# Altium PCB PCB.PcbDoc
Units mm, origin at the board's own origin, x right, y up, seen from the top; angles counter-clockwise.
Board outline 74 x 41.8 mm, 4 copper layers (SIG 1, GND, PWR, SIG 2), stack 0.603 mm thick; 54 components, 39 nets, 183 pads, 272 vias.
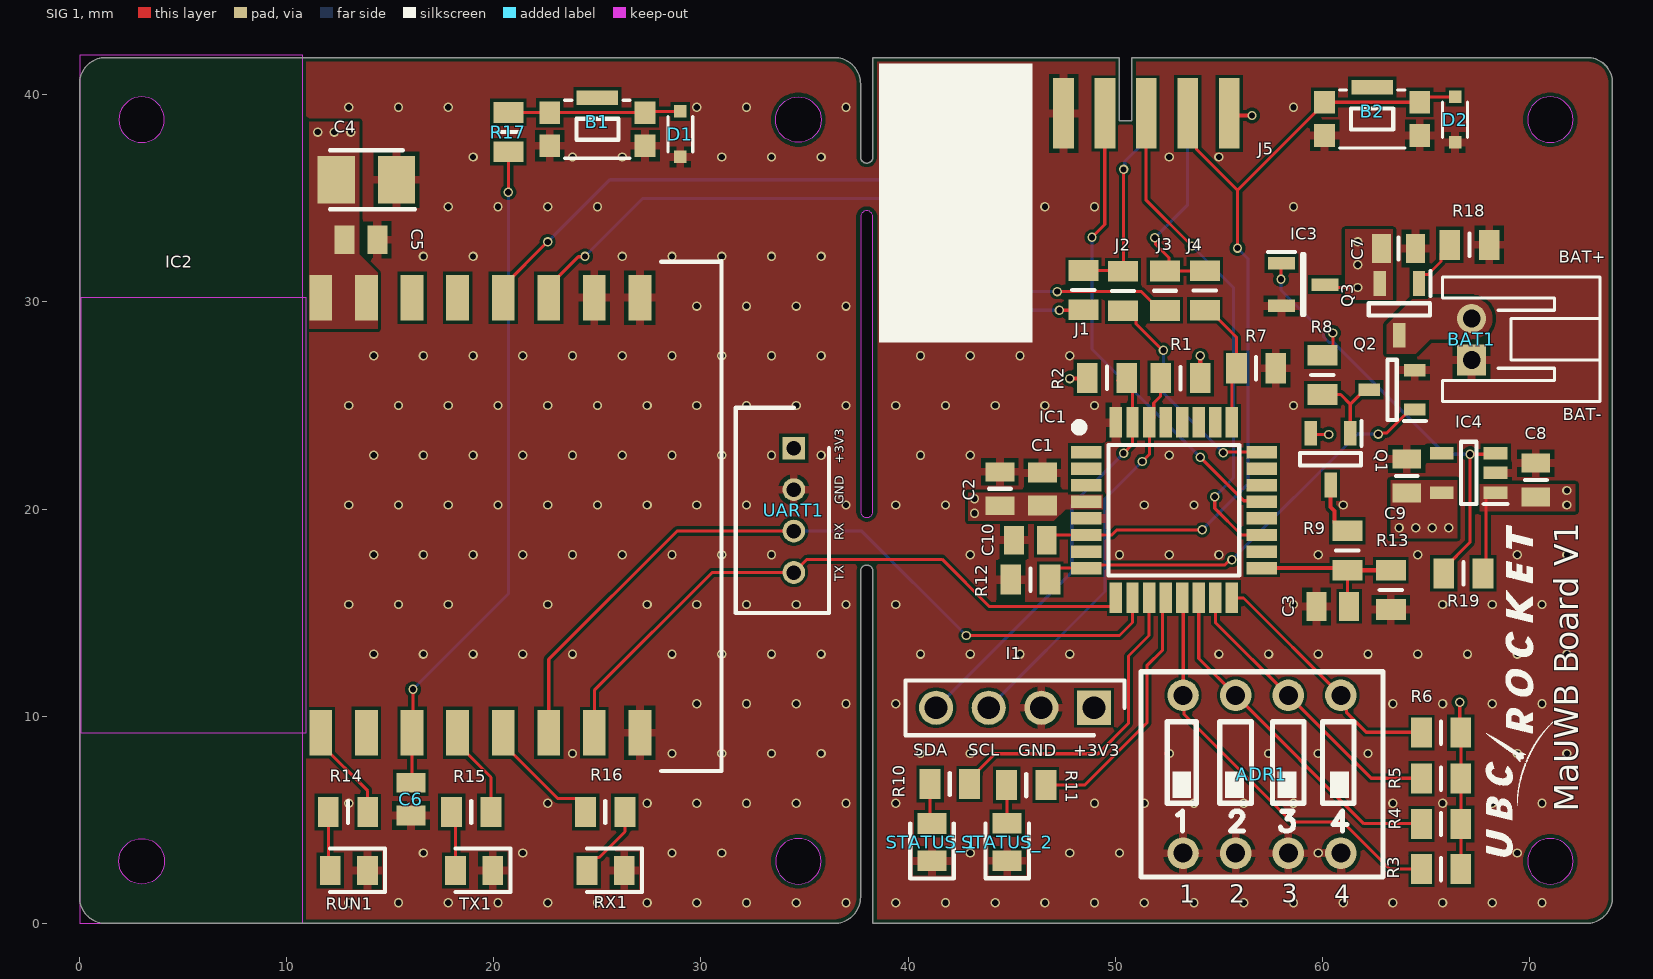
[diagram p0: SIG 1 view]
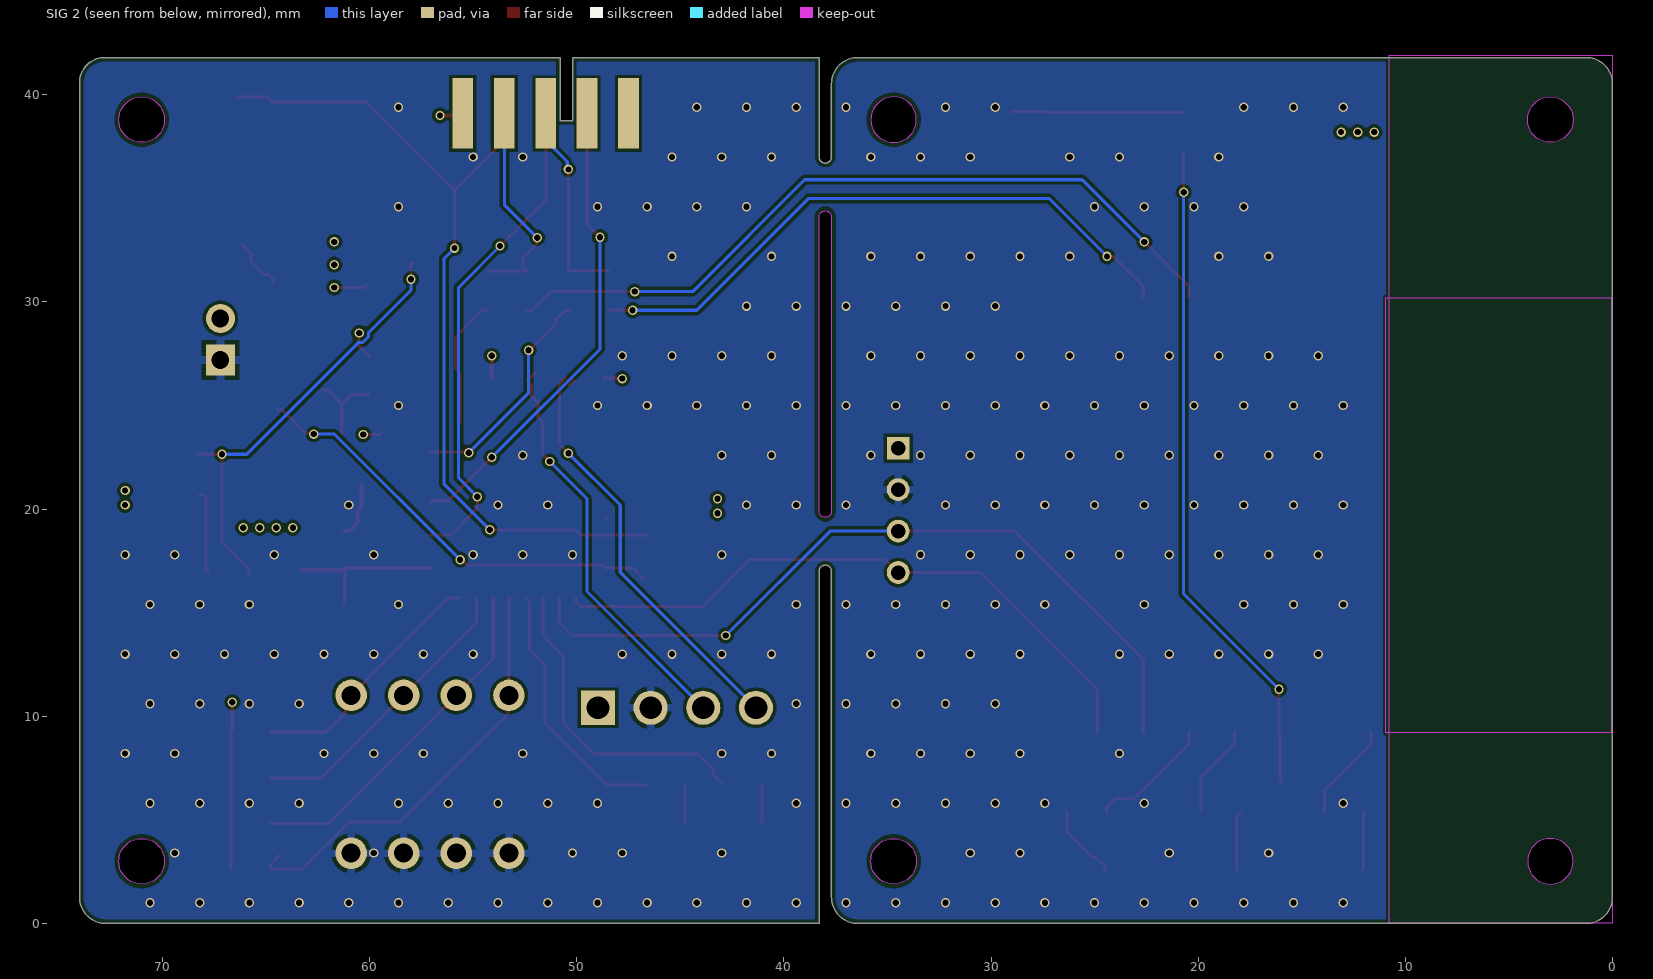
[diagram p1: SIG 2 view, seen from below]
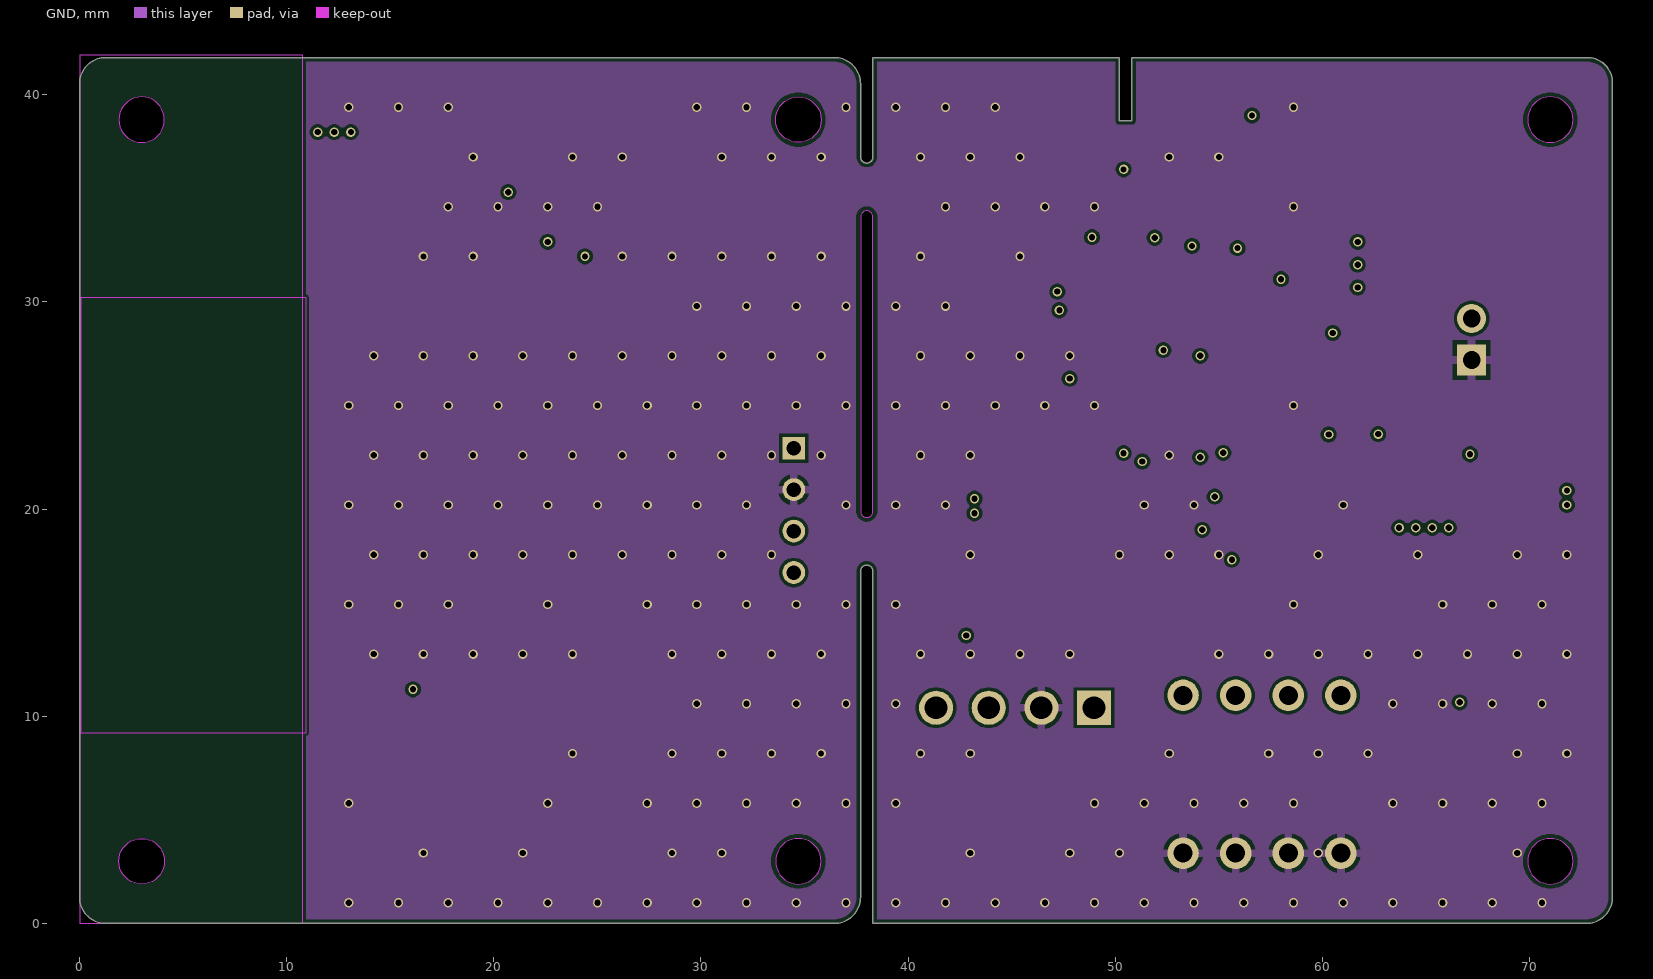
[diagram p2: GND]
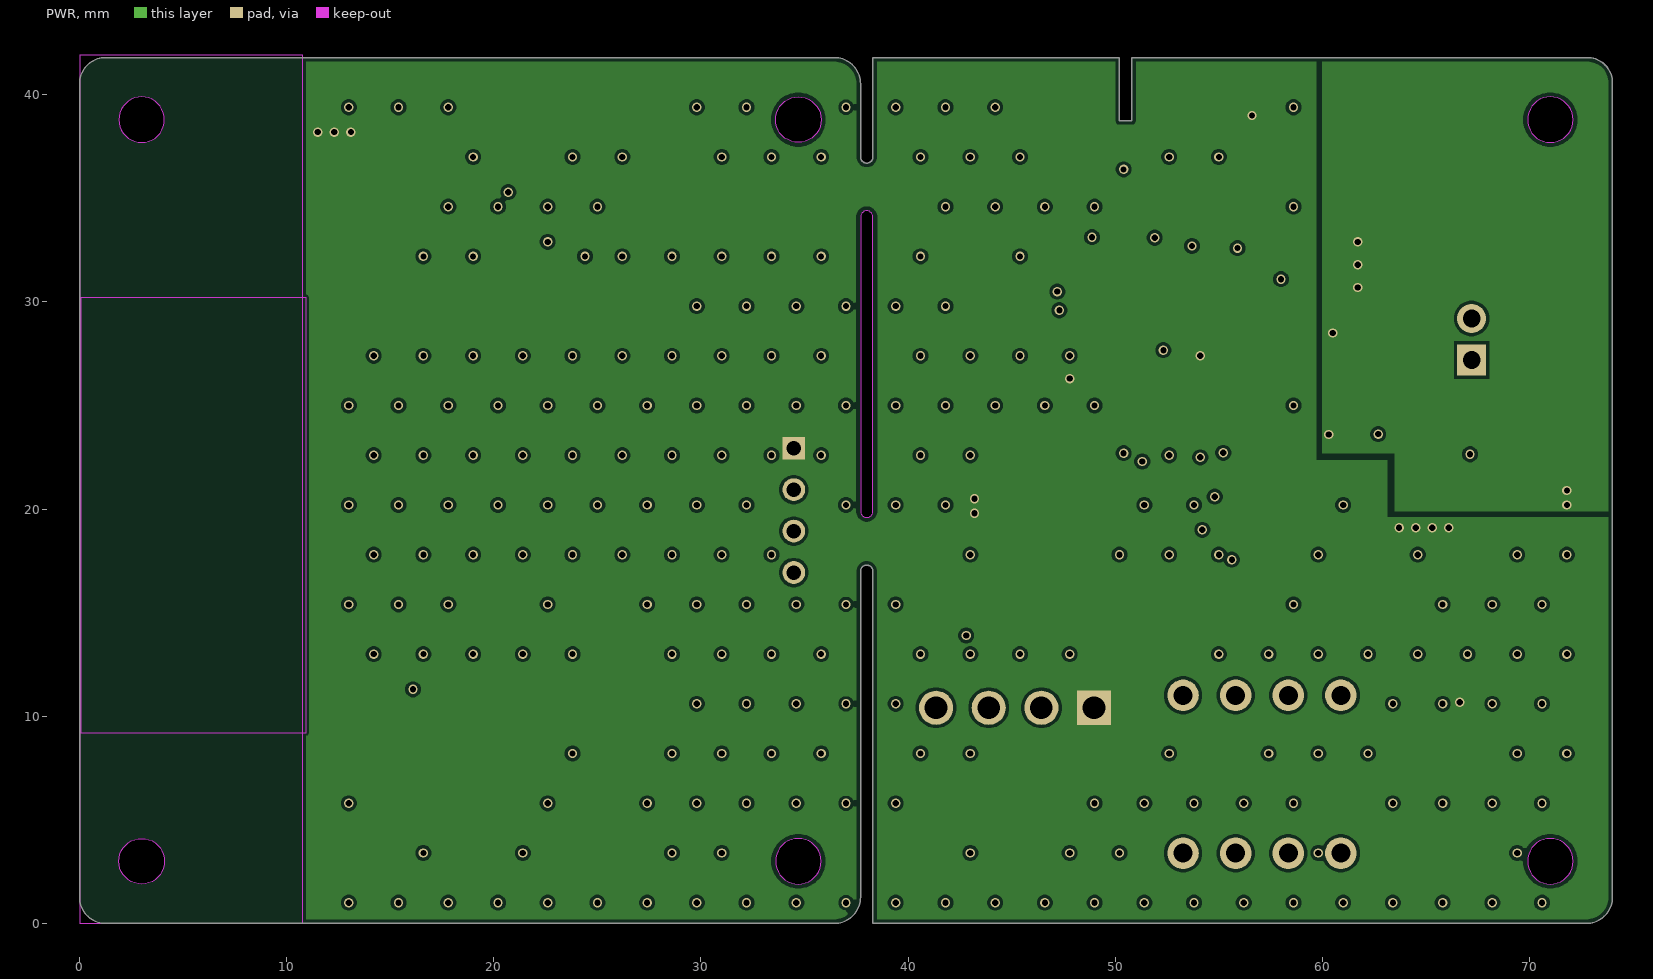
[diagram p3: PWR]
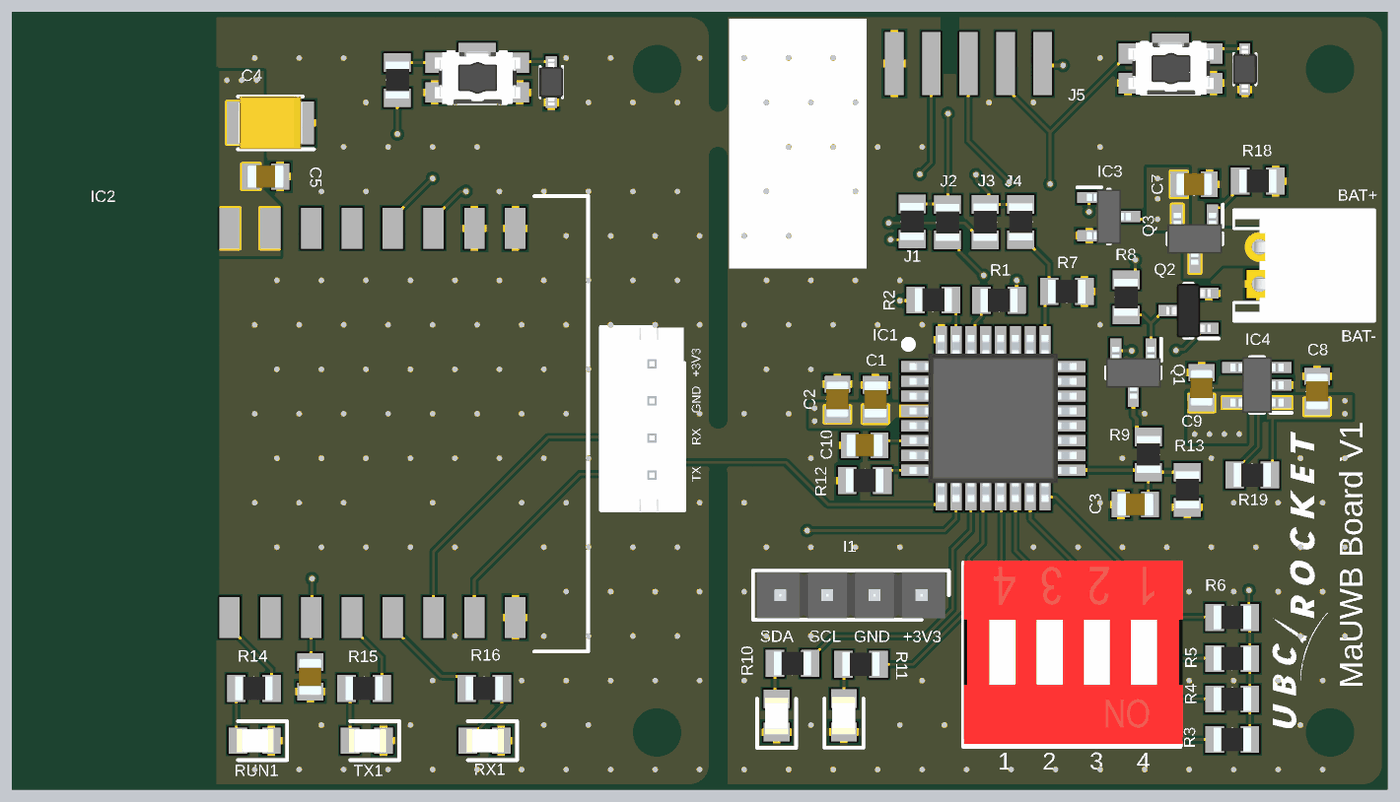
[diagram p4: 3D render of the assembled board from above, using the file's embedded part models]

## Layer stack, top to bottom
Top Solder: solder mask 0.0102, Solder Resist, Dk 3.5
SIG 1: signal copper 0.0356
Dielectric 2: prepreg 0.0711, PP-006, Dk 4.1
GND: signal copper 0.035
Dielectric 1: dielectric 0.32, FR-4, Dk 4.8
PWR: signal copper 0.035
Dielectric 3: prepreg 0.0711, PP-006, Dk 4.1
SIG 2: signal copper 0.0356
Bottom Solder: solder mask 0.0102, Solder Resist, Dk 3.5

## Board outline
1.27,0 36.43,0 ccw(c36.43,1.27) 37.7,1.27 37.7,17 cw(c38,17) 38,17.3 cw(c38,17) 38.3,17 38.3,0 72.73,0 ccw(c72.73,1.27) 74,1.27 74,40.58 ccw(c72.78,40.58) 72.78,41.8 50.8,41.8 50.8,38.75 50.2,38.75 50.2,41.8 38.3,41.8 38.3,37 cw(c38,37) 38,36.7 cw(c38,37) 37.7,37 37.7,40.53 ccw(c36.43,40.53) 36.43,41.8 1.27,41.8 ccw(c1.27,40.53) 0,40.53 0,1.27 ccw(c1.27,1.27)
cut-out: 69.9,38.8 ccw(c71,38.8) 71,37.7 ccw(c71,38.8) 72.1,38.8 ccw(c71,38.8) 71,39.9 ccw(c71,38.8)
cut-out: 69.9,3 ccw(c71,3) 71,1.9 ccw(c71,3) 72.1,3 ccw(c71,3) 71,4.1 ccw(c71,3)
cut-out: 34.7,37.7 cw(c34.7,38.8) 33.6,38.8 cw(c34.7,38.8) 34.7,39.9 cw(c34.7,38.8) 35.8,38.8 cw(c34.7,38.8)
cut-out: 3,37.7 ccw(c3,38.8) 4.1,38.8 ccw(c3,38.8) 3,39.9 ccw(c3,38.8) 1.9,38.8 ccw(c3,38.8)
cut-out: 33.6,3 ccw(c34.7,3) 34.7,1.9 ccw(c34.7,3) 35.8,3 ccw(c34.7,3) 34.7,4.1 ccw(c34.7,3)
cut-out: 3,1.9 cw(c3,3) 1.9,3 cw(c3,3) 3,4.1 cw(c3,3) 4.1,3 cw(c3,3)
cut-out: 37.7,19.9 ccw(c38,19.9) 38,19.6 ccw(c38,19.9) 38.3,19.9 38.3,34.1 ccw(c38,34.1) 38,34.4 ccw(c38,34.1) 37.7,34.1

## Design rules (kind name [scope] priority, off if disabled: settings)
BoardOutlineClearance [All] p1: gap=0.2 ignorepadtopadclearanceinfootprint=FALSE
Clearance Clearance_1 [All] p1: gap=0.15 ignorepadtopadclearanceinfootprint=TRUE
ComponentClearance MCU [InComponent('MCU')] p1: gap=0 collisioncheckmode=3 verticalgap=0 showdistances=FALSE
ComponentClearance ComponentClearance_1 [All] p2: gap=0.254 collisioncheckmode=3 verticalgap=0.254 showdistances=FALSE
HoleToHoleClearance [All] p1: gap=0.2 allowstackedmicrovias=TRUE
MinimumSolderMaskSliver [All] p1: minsoldermaskwidth=0.1
PlaneConnect [All] p1: planeconnectstyle=Direct reliefexpansion=0.508 reliefentries=4 reliefconductorwidth=0.254 reliefairgap=0.254
PolygonConnect PolygonConnect_PWR [InNet('3.3V') OR InNet('VBAT') OR InNet('BAT+')] p1: connectstyle=Direct reliefconductorwidth=0.254 reliefentries=4 polygonreliefangle="90 Angle" airgapwidth=0.254
PolygonConnect PolygonConnect_Via [IsVia] p2: connectstyle=Direct reliefconductorwidth=0.3 reliefentries=4 polygonreliefangle="90 Angle" airgapwidth=0.2
PolygonConnect [All] p3: connectstyle=Relief reliefconductorwidth=0.4 reliefentries=4 polygonreliefangle="90 Angle" airgapwidth=0.2
RoutingVias [All] p1: holewidth=0.3 width=0.45 viastyle="Through Hole" minholewidth=0.3 minwidth=0.45 maxholewidth=0.4 maxwidth=0.8
SilkToSilkClearance [All] p1: silktosilkclearance=0.15
SilkToSolderMaskClearance SilkToSolderMaskClearance_1 [InComponent('BAT')] p1: minsilkscreentomaskgap=0 clearancetoexposedcopper=TRUE
SilkToSolderMaskClearance [IsPad] p2: minsilkscreentomaskgap=0.1 clearancetoexposedcopper=TRUE
SolderMaskExpansion SolderMaskExpansion_Via [IsVia] p1: expansion=0.102 istentingtop=TRUE
SolderMaskExpansion [All] p2: expansion=0.102 istentingtop=FALSE
SupplyNets "Schematic Supply Nets_2" [InNet('VBAT')] p1: voltage=0.000
SupplyNets "Schematic Supply Nets" [InNet('GND')] p2: voltage=0.000
SupplyNets "Schematic Supply Nets_1" [InNet('3.3V')] p3: voltage=0.000
Width [All] p1: maxlimit=0.25 minlimit=0.15 preferedwidth=0.2
24 further rules are at their usual default settings.

## Classes and differential pairs
component class U_Debug: B2 C10 D2 J5
component class Root: BAT1 I1 J1 J2 J3 J4 UART1
component class U_MCU: ADR1 C1 C2 C3 IC1 Q1 Q2 R1 R2 R3 R4 R5 R6 R7 R8 R9 R10 R11 R12 R13 STATUS_1 STATUS_2
component class U_MaUWB: B1 C4 C5 C6 D1 IC2 R14 R15 R16 R17 RUN1 RX1 TX1
component class U_BMS: C7 C8 C9 IC3 IC4 Q3 R18 R19

## Components (designator, comment, footprint, x,y, rotation, side; value= is the part's Value field where it differs from the comment)
ADR1 "DS-04-R-T" DS-04-R-T 57.08,7.2 r0 top
B1 "KMR231GLFS" KMR231GLFS 25,38.7 r0 top
B2 "KMR231GLFS" KMR231GLFS 62.4,39.2 r0 top
BAT1 "S2B-PH-K-S_LF_SN" S2B-PH-K-S_LF_SN 67.2,28.2 r270 top
C1 "CC0805KRX7R9BB104" CAPC2012X95N 46.48,20.97 r270 top
C2 "CL21B105KAFNNNE" CAPC2012X135N 44.43,20.98 r90 top
C3 "CC0805KRX7R9BB104" CAPC2012X95N 60.5,15.3 r0 top
C4 "TAJB107M010RNJ" CAPPM3528X210N 13.85,35.9 r180 top
C5 "CC0805KRX7R9BB104" CAPC2012X95N 13.59,33 r180 top
C6 "CC0805KRX7R9BB104" CAPC2012X95N 16,6 r90 top
C7 "CL21B105KAFNNNE" CAPC2012X135N 63.67,32.58 r0 top
C8 "CL21B105KAFNNNE" CAPC2012X135N 70.3,21.4 r90 top
C9 "CL21B105KAFNNNE" CAPC2012X135N 64.067,21.599 r90 top
C10 "CC0805KRX7R9BB104" CAPC2012X95N 45.9,18.5 r0 top
D1 "PESD5V0S1BA,115" SOD2512X110N 29,38.1 r90 top
D2 "PESD5V0S1BA,115" SOD2512X110N 66.4,38.8 r90 top
I1 "PZ254V-11-04P" HDRV4W64P0X254_1X4_1016X250X890P 48.97,10.41 r180 top
IC1 "STM32G030K8T6" QFP80P900X900X160-32N 52.83,19.95 r0 top
IC2 "MaUWB_DW3000" MaUWB_DW3000 0.05,9.21 r90 top
IC3 "STM1061N34WX6F" SOT103P237X112-3N 59.07,30.84 r0 top
IC4 "AP2112K-3.3TRG1" SOT95P285X140-5N 67.06,21.75 r180 top
J1 "0805W8F0000T5E" "RESC2013X65N - Duplicate1" 48.46,30.57 r90 top
J2 "0805W8F0000T5E" "RESC2013X65N - Duplicate1" 50.37,30.53 r90 top
J3 "0805W8F0000T5E" "RESC2013X65N - Duplicate1" 52.4,30.54 r90 top
J4 "0805W8F0000T5E" "RESC2013X65N - Duplicate1" 54.32,30.55 r90 top
J5 "STLINK-SW" 009159010061911 47.5,39.35 r0 top
Q1 "AO3401A" "SOT95P280X125-3N - duplicate" 60.39,22.41 r270 top
Q2 "2N7002,215" SOT95P230X110-3N 63.36,25.76 r180 top
Q3 "AO3401A" "SOT95P280X125-3N - duplicate" 63.71,29.64 r270 top
R1 "0805W8F4701T5E" RESC2013X65N 53.15,26.32 r0 top
R2 "0805W8F4701T5E" RESC2013X65N 49.6,26.34 r180 top
R3 "0805W8F4701T5E" RESC2013X65N 65.73,2.62 r0 top
R4 "0805W8F4701T5E" RESC2013X65N 65.73,4.8 r0 top
R5 "0805W8F4701T5E" RESC2013X65N 65.73,6.99 r0 top
R6 "0805W8F4701T5E" RESC2013X65N 65.73,9.21 r0 top
R7 "0805W8F4701T5E" RESC2013X65N 56.8,26.8 r180 top
R8 "0805W8F4701T5E" RESC2013X65N 60,26.48 r90 top
R9 "0805W8F4701T5E" RESC2013X65N 61.2,18 r90 top
R10 "0805W8J0471T5E" "RESC2013X65N - Duplicate" 42.01,6.73 r0 top
R11 "0805W8J0471T5E" "RESC2013X65N - Duplicate" 45.7,6.68 r0 top
R12 "0805W8F4701T5E" RESC2013X65N 45.9,16.6 r0 top
R13 "0805W8F4701T5E" RESC2013X65N 63.3,16.1 r90 top
R14 "0805W8J0471T5E" "RESC2013X65N - Duplicate" 12.96,5.38 r0 top
R15 "0805W8J0471T5E" "RESC2013X65N - Duplicate" 18.91,5.38 r0 top
R16 "0805W8J0471T5E" "RESC2013X65N - Duplicate" 25.38,5.38 r180 top
R17 "0805,1K,1%" "RESC2013X65N - Duplicate2" 20.7,38.2 r270 top
R18 "0805W8F4701T5E" RESC2013X65N 67.1,32.76 r180 top
R19 "0805W8F1003T5E" "RESC2013X65N - Duplicate2" 66.8,16.9 r0 top
RUN1 "0805,GREEN" LEDC2012X120N 12.998,2.56 r180 top
RX1 "0805,RED" "LEDC2012X120N - Duplicate" 25.4,2.56 r180 top
STATUS_1 "0805,GREEN" LEDC2012X120N 41.15,3.92 r90 top
STATUS_2 "0805,RED" "LEDC2012X120N - Duplicate" 44.78,3.93 r90 top
TX1 "0805, Yellow" "LEDC2012X120N - Duplicate" 19.05,2.56 r180 top
UART1 "B4B-PH-K-S_LF__SN_" SHDR4W50P0X200_1X4_990X450X600P 34.48,22.94 r90 top

## Footprints (in the part's own frame and the unit in brackets; to place one, negate y for a bottom-side part, rotate by r counter-clockwise, add the part's x,y. Pads: shape width x height; smd on the part's side, far side on the other; paste and mask are expansions set on the pad)
009159010061911 [mm]
  rect 1x3.4 smd: 1(0,-0.25) 2(2,-0.25) 3(4,-0.25) 4(6,-0.25) 5(8,-0.25)
  rect 1x3.4 smd far side: 6(0,-0.25) 7(2,-0.25) 8(4,-0.25) 9(6,-0.25) 10(8,-0.25)
CAPC2012X95N [mm]
  rect 0.96x1.39 smd: 1(-0.79,0) 2(0.79,0)
  body extent -1,-0.63 1,0.63, height 0.95
CAPC2012X135N [mm]
  rect 0.91x1.39 smd: 1(-0.82,0) 2(0.82,0)
  silkscreen extent 0,-0.53 0,0.53, body extent -1,-0.63 1,0.63, height 1.35
CAPPM3528X210N [mm] "100uF, Tantalum"
  rect 1.8x2.3 smd: 1(-1.45,0) 2(1.45,0)
  silkscreen extent -2.35,-1.43 1.75,1.43, body extent -1.75,-1.43 1.75,1.43, height 2.1
DS-04-R-T [mil]
  rrect100% 60x60 hole 36: 1(-150,-150) 2(-150,150) 3(-50,-150) 4(-50,150) 5(50,-150) 6(50,150) 7(150,-150) 8(150,150)
  silkscreen extent -230,-195 230,195, body extent -230,-190 235,200, height 272
HDRV4W64P0X254_1X4_1016X250X890P [mm]
  rect 1.65x1.65 hole 1.1: 1(0,0)
  round 1.65 hole 1.1: 2(2.54,0) 3(5.08,0) 4(7.62,0)
  silkscreen extent -1.47,-1.33 9.09,1.33, body extent -1.27,-1.25 8.89,1.25, height 8.9
KMR231GLFS [mm]
  rect 1x1.1 smd: 1(-2.3,0.438) 2(2.3,0.438) 3(-2.3,-1.162) 4(2.3,-1.162)
  rect 2x0.7 smd: 5(0,1.162)
  silkscreen extent -1.57,-1.76 1.57,1.04, body extent -2.27,-1.78 2.33,1.07, height 1.95
LEDC2012X120N [mm]
  rect 1x1.4 smd: 1(-0.9,0) 2(0.9,0)
  silkscreen extent -1.75,-1.05 0.9,1.05, body extent -1.03,-0.62 0.97,0.63, height 1.1
"LEDC2012X120N - Duplicate" [mm]
  rect 1x1.4 smd: 1(-0.9,0) 2(0.9,0)
  silkscreen extent -1.75,-1.05 0.9,1.05, body extent -1.03,-0.62 0.97,0.63, height 1.1
MaUWB_DW3000 [mm]
  rect 2.2x1.1 smd: 1(0,-11.6) 2(0,-13.8) 3(0,-16) 4(0,-18.2) 5(0,-20.4) 6(0,-22.6) 7(0,-24.8) 8(0,-27) 9(21,-11.6) 10(21,-13.8) 11(21,-16) 12(21,-18.2) 13(21,-20.4) 14(21,-22.6) 15(21,-24.8) 16(21,-27)
  Keep-Out Layer region: 0,-10.883 21,-10.883 21,0 0,0
  silkscreen extent -1.85,-30.93 22.76,-28.03
QFP80P900X900X160-32N [mm]
  rect 1.475x0.6 smd: 1(-4.238,2.8) 2(-4.238,2) 3(-4.238,1.2) 4(-4.238,0.4) 5(-4.238,-0.4) 6(-4.238,-1.2) 7(-4.238,-2) 8(-4.238,-2.8) 17(4.238,-2.8) 18(4.238,-2) 19(4.238,-1.2) 20(4.238,-0.4) 21(4.238,0.4) 22(4.238,1.2) 23(4.238,2) 24(4.238,2.8)
  rect 0.6x1.475 smd: 9(-2.8,-4.238) 10(-2,-4.238) 11(-1.2,-4.238) 12(-0.4,-4.238) 13(0.4,-4.238) 14(1.2,-4.238) 15(2,-4.238) 16(2.8,-4.238) 25(2.8,4.238) 26(2,4.238) 27(1.2,4.238) 28(0.4,4.238) 29(-0.4,4.238) 30(-1.2,4.238) 31(-2,4.238) 32(-2.8,4.238)
  silkscreen extent -4.77,-3.15 3.15,4.2, body extent -4.5,-4.5 4.5,4.5, height 1.6
RESC2013X65N [mm]
  rect 1x1.45 smd: 1(-0.95,0) 2(0.95,0)
  silkscreen extent 0,-0.54 0,0.54, body extent -1,-0.64 1,0.64, height 0.65
"RESC2013X65N - Duplicate" [mm]
  rect 1x1.45 smd: 1(-0.95,0) 2(0.95,0)
  silkscreen extent 0,-0.54 0,0.54, body extent -1,-0.64 1,0.64, height 0.65
"RESC2013X65N - Duplicate1" [mm]
  rect 1x1.45 smd: 1(-0.95,0) 2(0.95,0)
  silkscreen extent 0,-0.54 0,0.54, body extent -1,-0.64 1,0.64, height 0.65
"RESC2013X65N - Duplicate2" [mm]
  rect 1x1.45 smd: 1(-0.95,0) 2(0.95,0)
  silkscreen extent 0,-0.54 0,0.54, body extent -1,-0.64 1,0.64, height 0.65
S2B-PH-K-S_LF_SN [mm]
  rect 1.5x1.4 hole 0.85: 1(1,0)
  rrect100% 1.4x1.4 hole 0.85: 2(-1,0)
  silkscreen extent -3,-1.4 3,6.2, body extent -3,-1.45 3,6.25, height 5.05
SHDR4W50P0X200_1X4_990X450X600P [mm]
  rect 1.1x1.1 hole 0.7: 1(0,0)
  round 1.1 hole 0.7: 2(-2,0) 3(-4,0) 4(-6,0)
  silkscreen extent -7.95,-1.7 1.95,2.8, body extent -8,-1.65 1.9,2.85, height 6
SOD2512X110N [mm]
  rect 0.6x0.6 smd: 1(-1.1,0) 2(1.1,0)
  silkscreen extent -0.85,-0.6 0.85,0.6, body extent -1.25,-0.65 1.25,0.65, height 1.1
SOT95P230X110-3N [mm]
  rect 1.05x0.6 smd: 1(-1.1,0.95) 2(-1.1,-0.95) 3(1.1,0)
  silkscreen extent -1.63,-1.45 0.23,1.5, body extent -1.2,-1.45 1.2,1.45, height 0.95
"SOT95P280X125-3N - duplicate" [mm]
  rect 1.2x0.6 smd: 1(-1.25,0.95) 2(-1.25,-0.95) 3(1.25,0)
  silkscreen extent -1.85,-1.48 0.3,1.5, body extent -1.4,-1.48 1.4,1.48, height 1.25
SOT95P285X140-5N [mm]
  rect 1.15x0.6 smd: 1(-1.3,0.95) 2(-1.3,0) 3(-1.3,-0.95) 4(1.3,-0.95) 5(1.3,0.95)
  silkscreen extent -1.88,-1.5 0.38,1.5, body extent -1.43,-1.5 1.43,1.5, height 1.4
SOT103P237X112-3N [mm]
  rect 1.3x0.6 smd: 1(-1.05,1.03) 2(-1.05,-1.03) 3(1.05,0)
  silkscreen extent -1.7,-1.46 0.05,1.58, body extent -1.18,-1.46 1.18,1.46, height 1.12

## Part data
ADR1: "-30℃~+85℃ 2.54mm 24V 25mA 3,000 Cycles 4 Red SPST Slide, Rocked Plugin,P=2.54mm DIP Switches ROHS", LCSC Part #=C5123702, Manufacturer=kangshen, Manu Part #=DS-04-R-T
B1 B2: "Tactile Switch SPST 300gf 1.9mm Gull Wing 4.6mm x 2.8mm Surface Mount", LCSC Part #=C99271, Manu Part #=KMR231GLFS
BAT1: "-25℃~+85℃ 1 100V 1x2P 2 2A 2P 2mm 4.8mm 5.9mm 7.6mm Brass K Pin PA66 PH Right Angle Tin UL94V-0 White 弯插,P=2mm Wire To Board Connector ROHS", LCSC Part #=C173752, Manufacturer=JST, Manu Part #=S2B-PH-K-S(LF)(SN)
C1 C3 C5 C6 C10: "100nF, 0805, X7R", LCSC Part #=C49678, Manufacturer_Name="Yageo Group", Manu Part #=CC0805KRX7R9BB104
C2 C7 C8 C9: "1uF, 0805, X7R", LCSC Part #=C28323, Manufacturer_Name=SAMSUNG, Manu Part #=CL21B105KBFNNNE
C4: "100uF, Tantalum", LCSC Part #=C7196, Manufacturer_Name="Kyocera AVX", Manu Part #=TAJB107M010RNJ
D1 D2: "14VC Clamp 12A@8/20us Ipp ESD DIODE SOD-323", LCSC Part #=C19224, Manu Part #=PESD5V0S1BA,115
I1: "4 pin 2.54mm Header", LCSC Part #=C2691448, Manufacturer_Name=XFCN, Manufacturer_Part_Number=PZ254V-11-04P
IC1: "-40℃~+85℃ 12bit 2V~3.6V 30 32 Bit 64KB 64MHz 8KB ARM Cortex-M0+ Built-in+External FLASH LQFP-32(7x7) Microcontrollers (MCU/MPU/SOC) ROHS", LCSC Part #=C431631, Manufacturer_Name=STMicroelectronics, Manu Part #=STM32G030K8T6
IC3: "3.4V Voltage Supervisor", LCSC Part #=C222402, Manufacturer_Name=STMicroelectronics, Datasheet Link=https://www.st.com/resource/en/datasheet/stm1061.pdf, Height=1.12mm, Manu Part #=STM1061N34WX6F
IC4: "3.3V 600mA LDO", LCSC Part #=C51118, Manufacturer_Name="Diodes Incorporated", Datasheet Link=https://www.diodes.com//assets/Datasheets/AP2112.pdf, Height=1.4mm, Manu Part #=AP2112K-3.3TRG1
J1 J2 J3 J4: "0 Ohm, 0805, 1%", LCSC Part #=C17477, Manufacturer_Name="UNI-ROYAL(Uniroyal Elec)", Height=0.65mm, Manu Part #=0805W8F0000T5E
J5: "SSL Connector 10 Position Adapter, Bridge Board to Board - Card Edge 0.079\" (2.00mm)"
Q1 Q3: "PMOS 4.2A SOT-23", LCSC Part #=C21266, Manu Part #=AO3401A
Q2: "MOSFET (N-Channel)", LCSC Part #=C65189, Manufacturer_Name=Nexperia, Manu Part #=2N7002,215
R1 R2 R3 R4 R5 R6 R7 R8 R9 R12 R13 R18: "4.7k 0805 1%", LCSC Part #=C17673, Manufacturer_Name="UNI-ROYAL(Uniroyal Elec)", Manu Part #=0805W8F4701T5E
R10 R11 R14 R15 R16: "470, 0805, 5%", LCSC Part #=C17710, Manufacturer_Name=ROYALOHM, Manu Part #=0805W8F4700T5E
R17: library part 0805W8F1001T5E, "-55℃~+155℃ 125mW 150V 1kΩ Thick Film Resistor ±1% ±100ppm/℃ 0805 Chip Resistor - Surface Mount ROHS", LCSC Part #=C17513, Manu Part #=0805W8F1001T5E
R19: "100K, 0805, 1%", LCSC Part #=C149504, Manufacturer_Name=ROYALOHM, Datasheet Link=https://www.mouser.in/datasheet/2/1365/1-3044649.pdf, Height=0.65mm, Manu Part #=0805W8F1003T5E
RUN1 STATUS_1: library part LTST-C170GKT, "Green 569nm LED Indication - Discrete 2.1V 0805 (2012 Metric)", LCSC Part #=C125090, Manufacturer_Name=Lite-On, Mouser Part Number=859-LTST-C170GKT, Arrow Part Number=LTST-C170GKT, Arrow Price/Stock=https://www.arrow.com/en/products/ltst-c170gkt/lite-on-technology?utm_currency=USD&region=nac, Datasheet Link=https://mm.digikey.com/Volume0/opasdata/d220001/medias/docus/895/LTST-C170GKT.pdf, Height=1.2mm, Manu Part #=LTST-C170GKT, Manufacturer_Part_Number=LTST-C170GKT, Mouser Price/Stock=https://www.mouser.co.uk/ProductDetail/LITEON/LTST-C170GKT?qs=%2FSqKn2EfXQSV5aRij3YIfQ%3D%3D
RX1 STATUS_2: library part LTST-C170KRKT, "Red 631nm LED Indication - Discrete 2V 0805 (2012 Metric)", LCSC Part #=C94868, Manufacturer_Name=Lite-On, Mouser Part Number=859-LTST-C170KRKT, Arrow Part Number=LTST-C170KRKT, Arrow Price/Stock=https://www.arrow.com/en/products/ltst-c170krkt/lite-on-technology?utm_currency=USD&region=nac, Datasheet Link=https://componentsearchengine.com/Datasheets/1/LTST-C170KRKT.pdf, Height=1.2mm, Manu Part #=LTST-C170KRKT, Manufacturer_Part_Number=LTST-C170KRKT, Mouser Price/Stock=https://www.mouser.co.uk/ProductDetail/LITEON/LTST-C170KRKT?qs=NUb82WqeCyrVOID%2Fxt4rgA%3D%3D
TX1: library part KT-0603W, "Yellow 631nm LED Indication - Discrete 2V 0805 (2012 Metric)", LCSC Part #=C2290, Manufacturer_Name="Hubei KENTO Elec", Manu Part #=KT-0603W
UART1: "JST 4 pin", LCSC Part #=C131334, Manufacturer_Name="JST (JAPAN SOLDERLESS TERMINALS)", Datasheet Link=https://datasheet.lcsc.com/szlcsc/JST-Sales-America-B4B-PH-K-S-LF-SN_C131334.pdf, Height=6mm, Manu Part #=B4B-PH-K-S(LF)(SN)

## Via types
v1: diameter 0.45, hole 0.3, SIG 1 to SIG 2, tented both sides, 272 vias

## Nets (pads, with @x,y where several pads share a name; then routed paths per layer and width w, separated by ;. In a path a pad name is that pad's centre, name@x,y a point inside that pad or via, vN(x,y) a via of type N, cw(c..) or ccw(c..) an arc to the next point about the centre after c; other vN are vias at no path point)
3.3V: C1.2 C2.1 C4.2 C5.2 C9.1 I1.1 IC1.4 IC2.9 IC2.10 IC4.5 J5.5 R1.2 R2.2 R3.2 R4.2 R5.2 R6.2 UART1.1 | length 11.4
  SIG 1 w0.15: v1(66.625,10.675) 66.625,9.265 R6.2 R5.2 R4.2 R3.2
  SIG 1 w0.2: v1(47.8,26.3) 48.61,26.3 R2.2 ; R1.2 v1(54.1,27.4) ; J5.5@55.2,39.02 55.22,39 v1(56.6,39)
  other v1: 63.7,19.1 64.5,19.1 65.3,19.1 66.1,19.1 43.2,19.8 43.2,20.5 11.5,38.2 12.3,38.2 13.1,38.2
ADR1: ADR1.2 IC1.13 R3.1 | length 21
  SIG 1 w0.15: IC1.13 53.28,15.662 ADR1.2@53.28,11.01 ; ADR1.2 53.309,10.971 53.309,10.111 58.52,4.9 60.98,4.9 63.26,2.62 R3.1 64.78,2.845 R3.1@64.355,3.27
ADR2: ADR1.4 IC1.14 R4.1 | length 17
  SIG 1 w0.15: IC1.14 54.03,12.79 ADR1.4 62,4.82 R4.1@64.78,4.82
ADR3: ADR1.6 IC1.15 R5.1 | length 14.2
  SIG 1 w0.15: IC1.15 54.83,14.53 ADR1.6 62.35,7.01 R5.1@64.78,7.01
ADR4: ADR1.8 IC1.16 R6.1 | length 12.1
  SIG 1 w0.15: IC1.16 56.188,15.712 ADR1.8 ; ADR1.8@60.611,10.731 60.797,10.731 61.153,10.375 61.153,10.189 62.112,9.23 R6.1@64.78,9.23
BAT+: BAT1.2 Q3.3
GND: ADR1.1 ADR1.3 ADR1.5 ADR1.7 B1.3 B1.4 B2.3 B2.4 BAT1.1 C1.1 C2.2 C3.1 C4.1 C5.1 C6.1 C7.2 C8.2 C9.2 C10.1 D1.1 D2.1 I1.2 IC1.5 IC1.32 IC2.8 IC2.15 IC2.16 IC3.2 IC4.2 J5.1 Q2.2 R7.1 R12.1 R13.1 R18.1 RUN1.1 RX1.1 STATUS_1.1 STATUS_2.1 TX1.1 UART1.2 | length 0.1
  SIG 1 w0.15: IC1.5 IC1.5@48.642,19.6
  other v1: 13,1 15.4,1 17.8,1 20.2,1 22.6,1 25,1 27.4,1 29.8,1 32.2,1 34.6,1 37,1 39.4,1 41.8,1 44.2,1 46.6,1 49,1 51.4,1 53.8,1 56.2,1 58.6,1 61,1 63.4,1 65.8,1 68.2,1 70.6,1 16.6,3.4 21.4,3.4 28.6,3.4 31,3.4 43,3.4 47.8,3.4 50.2,3.4 59.8,3.4 69.4,3.4 13,5.8 22.6,5.8 27.4,5.8 29.8,5.8 32.2,5.8 34.6,5.8 37,5.8 39.4,5.8 49,5.8 51.4,5.8 53.8,5.8 56.2,5.8 58.6,5.8 63.4,5.8 65.8,5.8 68.2,5.8 70.6,5.8 23.8,8.2 28.6,8.2 31,8.2 33.4,8.2 35.8,8.2 40.6,8.2 43,8.2 52.6,8.2 57.4,8.2 59.8,8.2 62.2,8.2 69.4,8.2 71.8,8.2 29.8,10.6 32.2,10.6 34.6,10.6 37,10.6 39.4,10.6 63.4,10.6 65.8,10.6 68.2,10.6 70.6,10.6 14.2,13 16.6,13 19,13 21.4,13 23.8,13 28.6,13 31,13 33.4,13 35.8,13 40.6,13 43,13 45.4,13 47.8,13 55,13 57.4,13 59.8,13 62.2,13 64.6,13 67,13 69.4,13 71.8,13 13,15.4 15.4,15.4 17.8,15.4 22.6,15.4 27.4,15.4 29.8,15.4 32.2,15.4 34.6,15.4 37,15.4 39.4,15.4 58.6,15.4 65.8,15.4 68.2,15.4 70.6,15.4 14.2,17.8 16.6,17.8 19,17.8 21.4,17.8 23.8,17.8 26.2,17.8 28.6,17.8 31,17.8 33.4,17.8 43,17.8 50.2,17.8 52.6,17.8 55,17.8 59.8,17.8 64.6,17.8 69.4,17.8 71.8,17.8 13,20.2 15.4,20.2 17.8,20.2 20.2,20.2 22.6,20.2 25,20.2 27.4,20.2 29.8,20.2 32.2,20.2 37,20.2 39.4,20.2 41.8,20.2 51.4,20.2 53.8,20.2 61,20.2 14.2,22.6 16.6,22.6 19,22.6 21.4,22.6 23.8,22.6 26.2,22.6 28.6,22.6 31,22.6 33.4,22.6 35.8,22.6 40.6,22.6 43,22.6 52.6,22.6 13,25 15.4,25 17.8,25 20.2,25 22.6,25 25,25 27.4,25 29.8,25 32.2,25 34.6,25 37,25 39.4,25 41.8,25 44.2,25 46.6,25 49,25 58.6,25 14.2,27.4 16.6,27.4 19,27.4 21.4,27.4 23.8,27.4 26.2,27.4 28.6,27.4 31,27.4 33.4,27.4 35.8,27.4 40.6,27.4 43,27.4 45.4,27.4 47.8,27.4 29.8,29.8 32.2,29.8 34.6,29.8 37,29.8 39.4,29.8 41.8,29.8 16.6,32.2 19,32.2 26.2,32.2 28.6,32.2 31,32.2 33.4,32.2 35.8,32.2 40.6,32.2 45.4,32.2 17.8,34.6 20.2,34.6 22.6,34.6 25,34.6 41.8,34.6 44.2,34.6 46.6,34.6 49,34.6 58.6,34.6 19,37 23.8,37 26.2,37 31,37 33.4,37 35.8,37 40.6,37 43,37 45.4,37 52.6,37 55,37 13,39.4 15.4,39.4 17.8,39.4 29.8,39.4 32.2,39.4 37,39.4 39.4,39.4 41.8,39.4 44.2,39.4 58.6,39.4
I2C1_SCL: I1.3 IC1.30 R1.1 | length 19.8
  SIG 1 w0.15: v1(51.3,22.3) 51.66,22.66 51.66,24.158 IC1.30 51.855,24.413 51.855,25.125 52.188,25.458 52.188,26.008 52.38,26.2 R1.1@52.023,26.557
  SIG 2 w0.15: I1.3 49.5,16.02 49.5,20.5 v1(51.3,22.3)
I2C1_SDA: I1.4 IC1.31 R2.1 | length 20.3
  SIG 1 w0.15: R2.1@50.12,26.21 R2.1@50.363,25.967 ; v1(50.4,22.7) 50.83,23.13 50.83,26.06 R2.1
  SIG 2 w0.15: I1.4 47.9,16.96 47.9,20.2 v1(50.4,22.7)
NetB1_1: B1.1 B1.2 D1.2 R17.1 | length 8.3
  SIG 1 w0.15: R17.1 22.688,39.15 B1.1 B1.2 27.362,39.2 D1.2
NetQ1_1: Q1.1 Q2.3 R8.1 | length 4.1
  SIG 1 w0.15: R8.1 60.875,25.53 61.34,25.065 ; Q1.1 61.34,25.065 ; Q2.3 62.035,25.76 61.34,25.065
NetQ1_3: Q1.3 R9.2 | length 2.7
  SIG 1 w0.2: Q1.3 60.39,20.098 60.575,19.913 60.575,19.35 60.975,18.95 R9.2
NetQ3_1: Q3.1 R18.2 | length 2.6
  SIG 1 w0.15: Q3.1 64.66,31.102 64.885,31.327 65.097,31.327 65.725,31.955 65.725,32.335 R18.2
NetR10_1: R10.1 STATUS_1.2 | length 1.9
  SIG 1 w0.15: R10.1 41.06,4.91 STATUS_1.2
NetR11_1: R11.1 STATUS_2.2 | length 1.9
  SIG 1 w0.15: R11.1 44.78,6.65 STATUS_2.2
NetR14_1: R14.1 RUN1.2 | length 2.9
  SIG 1 w0.15: R14.1 12.01,2.648 RUN1.2
NetR15_1: R15.1 TX1.2 | length 2.9
  SIG 1 w0.15: R15.1 18.15,5.19 TX1.2
NetR16_1: R16.1 RX1.2 | length 3.7
  SIG 1 w0.15: RX1.2 24.5,2.76 24.925,3.185 25.085,3.185 26.33,4.43 R16.1
NRST: B2.1 B2.2 C10.2 D2.2 IC1.6 J5.4 | length 42.6
  SIG 1 w0.15: C10.2@46.57,18.75 IC1.6 49.829,18.75 50.079,19 v1(54.2,19) ; J5.4@53.49,39.31 53.925,38.875 53.925,37.363 55.9,35.388 ; v1(55.9,32.6) 55.9,35.388 ; D2.2 64.962,39.9 B2.2 B2.1 60.1,39.588 55.9,35.388
  SIG 2 w0.15: v1(54.2,19) 56.4,21.2 56.4,32.1 v1(55.9,32.6)
RESET: IC3.1 IC4.3 R19.1 | length 21.5
  SIG 1 w0.15: v1(58,31.1) 58,31.775 57.905,31.87 IC3.1 ; R19.1 65.85,17.125 67.125,18.4 v1(67.125,22.649) 68.309,22.649 IC4.3
  SIG 2 w0.15: v1(58,31.1) 58,30.57 60.05,28.52 60.05,28.314 60.314,28.05 60.52,28.05 65.921,22.649 v1(67.125,22.649)
RESET_N: C6.2 IC2.3 R17.2 | length 32.4
  SIG 1 w0.15: C6.2 16.05,6.84 IC2.3 16.1,9.26 v1(16.1,11.3) ; v1(20.7,35.3) R17.2
  SIG 2 w0.15: v1(16.1,11.3) 20.7,15.9 v1(20.7,35.3)
RUN_LED: IC2.1 R14.2 | length 4.8
  SIG 1 w0.15: IC2.1 11.65,8.66 13.91,6.4 R14.2
"RX LED": IC2.5 R16.2 | length 6
  SIG 1 w0.15: IC2.5 20.45,8.66 23.08,6.03 24.005,6.03 24.43,5.605 R16.2
STAT_LEDG: IC1.11 R10.2 | length 15.5
  SIG 1 w0.15: R10.2 43.385,7.155 43.385,7.385 44.19,8.19 49.17,8.19 50.64,9.66 50.64,12.91 51.63,13.9 IC1.11
STAT_LEDR: IC1.12 R11.2 | length 12.5
  SIG 1 w0.15: R11.2 48.53,6.68 51.525,9.675 51.525,12.442 52.283,13.2 52.283,15.565 IC1.12
SWCLK: J3.2 J4.2 J5.9 | length 10.8
  SIG 1 w0.15: v1(51.9,33.1) 51.934,33.066 51.934,32.798 52.592,32.14 52.592,31.682 J3.2 52.41,31.5 J4.2
  SIG 2 w0.15: v1(51.9,33.1) 53.49,34.69 J5.9@53.49,39.31
SWDIO: J1.2 J2.2 J5.8 | length 10.2
  SIG 1 w0.15: J1.2 50.33,31.52 J2.2 50.4,31.51 v1(50.4,36.4)
  SIG 2 w0.15: v1(50.4,36.4) 50.457,36.457 50.457,36.777 51.49,37.81 J5.8@51.49,39.31
SYS_SWCLK: IC1.25 J4.1 R7.2 | length 6.3
  SIG 1 w0.15: J4.1 54.545,29.6 55.85,28.295 R7.2 55.63,26.58 IC1.25
SYS_SWDIO: IC1.24 J2.1 | length 10.9
  SIG 1 w0.15: J2.1 50.567,29.58 50.992,29.155 50.992,28.958 52.28,27.67 v1(52.32,27.67) ; v1(55.21,22.72) 55.24,22.75 IC1.24
  SIG 2 w0.15: v1(52.32,27.67) 52.32,25.61 v1(55.21,22.72)
T_RX: IC1.21 J5.2 | length 23.1
  SIG 1 w0.15: v1(48.875,33.125) 49.49,33.74 J5.2@49.49,39.31 ; v1(54.1,22.5) 56.193,20.407 57.011,20.407 IC1.21
  SIG 2 w0.15: v1(48.875,33.125) 48.875,27.725 v1(54.1,22.5)
T_TX: IC1.19 J5.3 | length 24.2
  SIG 1 w0.15: J5.3@51.49,39.31 51.49,34.91 v1(53.7,32.7) ; v1(54.8,20.6) 54.8,20.042 56.092,18.75 IC1.19
  SIG 2 w0.15: v1(53.7,32.7) 55.7,30.7 55.7,21.5 v1(54.8,20.6)
"TX LED": IC2.4 R15.2 | length 4.5
  SIG 1 w0.15: IC2.4 18.25,8.66 19.86,7.05 R15.2
USART2_RX: IC1.10 IC2.6 UART1.3 | length 37.8
  SIG 1 w0.15: IC2.6 22.65,12.75 28.84,18.94 UART1.3 ; v1(42.8,13.9) 50.2,13.9 50.83,14.53 IC1.10
  SIG 2 w0.15: UART1.3 37.76,18.94 v1(42.8,13.9)
USART2_TX: IC1.9 IC2.7 UART1.4 | length 31.1
  SIG 1 w0.15: IC2.7 24.85,11.25 30.54,16.94 UART1.4 35.115,17.575 41.64,17.575 43.915,15.3 49.805,15.3 50.03,15.525 IC1.9
UWB_SWCLK: IC2.13 J3.1 | length 37.2
  SIG 1 w0.15: IC2.13 20.45,30.76 22.59,32.9 v1(22.6,32.9) ; v1(47.2,30.5) 51.265,30.5 52.175,29.59 J3.1
  SIG 2 w0.15: v1(22.6,32.9) 25.6,35.9 39,35.9 44.4,30.5 v1(47.2,30.5)
UWB_SWDIO: IC2.14 J1.1 | length 30.4
  SIG 1 w0.15: IC2.14 22.65,30.76 23.125,31.235 23.135,31.235 24.082,32.182 24.382,32.182 v1(24.4,32.2) ; v1(47.3,29.6) 48.44,29.6 J1.1
  SIG 2 w0.15: v1(24.4,32.2) 27.2,35 38.8,35 44.2,29.6 v1(47.3,29.6)
VBAT: C7.1 C8.1 IC3.3 IC4.1 Q1.2 Q3.2 R8.2 R19.2 | length 7.9
  SIG 1 w0.15: Q1.2 59.5,23.6 v1(60.3,23.6) ; R8.2 60.075,27.43 60.5,27.855 v1(60.5,28.5) ; IC3.3 60.26,30.7 v1(61.7,30.7) ; R19.2 67.9,17.05 67.9,20.575 68.012,20.687 IC4.1@68.197,20.687
  other v1: 71.8,20.2 71.8,20.9 61.7,31.8 61.7,32.9
VBAT_ADC: C3.2 IC1.17 R9.1 R13.2 | length 8.1
  SIG 1 w0.15: R9.1 61.2,15.39 C3.2
  SIG 1 w0.2: IC1.17 61.1,17.15 R9.1 R13.2
VBAT_TRIGGER: IC1.8 Q2.1 R12.2 | length 21.1
  SIG 1 w0.15: R12.2 46.85,16.725 47.275,17.15 IC1.8 48.742,17.3 55.289,17.3 55.547,17.558 v1(55.628,17.558) ; v1(62.69,23.62) 62.747,23.677 63.102,23.677 64.235,24.81 Q2.1
  SIG 2 w0.15: v1(55.628,17.558) 61.69,23.62 v1(62.69,23.62)
pads on no net: B1.5 B2.5 IC1.1 IC1.2 IC1.3 IC1.7 IC1.18 IC1.20 IC1.22 IC1.23 IC1.26 IC1.27 IC1.28 IC1.29 IC2.2 IC2.11 IC2.12 IC4.4 J5.6 J5.7 J5.10

## Polygon pours and split planes (outlines as drawn)
3.3V on PWR "3.3V_L03_P003" (solid, pour order 3): 63.131,19.6 74.1,19.6 74.1,0 0.01,0 0.01,41.85 0.02,41.86 59.7,41.86 59.7,22.367 63.131,22.367
VBAT on PWR "VBAT_L03_P004" (solid, pour order 4): 60,41.85 60,22.7 63.5,22.7 63.5,19.9 74.13,19.9 74.13,41.84 63.16,41.84
GND on SIG 1 "GND_L01_P013" (solid, pour order 13): 0,0 74.157,0 74.157,41.91 0,41.91
VBAT on SIG 1 "VBAT_L01_P009" (solid, pour order 9): 63.4,33.5 61.1,33.5 61.1,30.1 63.4,30.1
3.3V on SIG 1 "3.3V_L01_P012" (solid, pour order 12): 66.5,21.4 63.3,21.4 63.3,18.6 66.5,18.6
VBAT on SIG 1 "VBAT_L01_P011" (solid, pour order 11): 67.6,21.2 72.2,21.2 72.2,19.9 67.6,19.9
BAT+ on SIG 1 "BAT+_L01_P007" (solid, pour order 7): 67.2,30.2 cw(c67.2,29.2) 68.2,29.2 cw(c67.2,29.2) 67.2,28.2 65.2,28.2 64.5,27.5 63.1,27.5 63.1,28.9 64.4,30.2
3.3V on SIG 1 "3.3V_L01_P006" (solid, pour order 6): 49.4,20.8 42.9,20.8 42.9,19.438 47.038,19.438 47.6,20 49.4,20
3.3V on SIG 1 "3.3V_L01_P002" (solid, pour order 2): 14.4,28.7 14.4,31.4 13.5,32.3 13.5,38.7 11.1,38.7 11.1,28.7
GND on GND "GND_L02_P000" (solid, pour order 0): 0,0 74.157,0 74.157,41.91 0,41.91
GND on SIG 2 "GND_L04_P005" (solid, pour order 5): 0,0 74.157,0 74.157,41.91 0,41.91

## Keep-outs
Keep-Out Layer:
  rectangle: 0,0 10.78,41.91

## Silkscreen, mask and mechanical layers (free items; w line width, h text height)
Top Overlay:
  drawing of 15 lines, arcs and shapes, not listed
  text "BAT+" at 71.4,31.7 h1
  text "BAT-" at 71.6,24.1 h1
  text "+3V3" at 37.033,22.182 h0.75 r90
  text "GND" at 37.036,20.232 h0.75 r90
  text "RX" at 37.035,18.504 h0.75 r90
  text "TX" at 37.035,16.522 h0.75 r90
  text "SDA" at 40.251,7.893 h1
  text "SCL" at 42.901,7.893 h1
  text "GND" at 45.311,7.883 h1
  text "+3V3" at 47.958,7.874 h1
  text "MaUWB Board V1" at 72.739,5.39 h2 r90
  text "3" at 58.036,0.727 h1.5
  text "1" at 53.093,0.718 h1.5
  text "2" at 55.492,0.718 h1.5
  text "4" at 60.568,0.72 h1.5
Board:
  circle w0.2: c3,3 r1.1
  circle w0.2: c3,38.8 r1.1
  circle w0.2: c34.7,3 r1.1
  circle w0.2: c34.7,38.8 r1.1
  circle w0.2: c71,38.8 r1.1
  circle w0.2: c71,3 r1.1
  lines w0.2: 50.2,41.8 38.3,41.8 38.3,37 cw(c38,37) 38,36.7 cw(c38,37) 37.7,37 37.7,40.53 ccw(c36.43,40.53) 36.43,41.8 34.7,41.8 1.27,41.8 ccw(c1.27,40.53) 0,40.53 0,1.27 ccw(c1.27,1.27) 1.27,0 36.43,0 ccw(c36.43,1.27) 37.7,1.27 37.7,1.8 37.7,17 cw(c38,17) 38,17.3 cw(c38,17) 38.3,17 38.3,0 72.73,0 ccw(c72.73,1.27) 74,1.27 74,40.58 ccw(c72.78,40.58) 72.78,41.8 50.8,41.8 ; 37.7,19.9 ccw(c38,19.9) 38,19.6 ccw(c38,19.9) 38.3,19.9 38.3,34.1 ccw(c38,34.1) 38,34.4 ccw(c38,34.1) 37.7,34.1 37.7,19.9